# EAGLE board IoT (EAGLE 9.1.0)
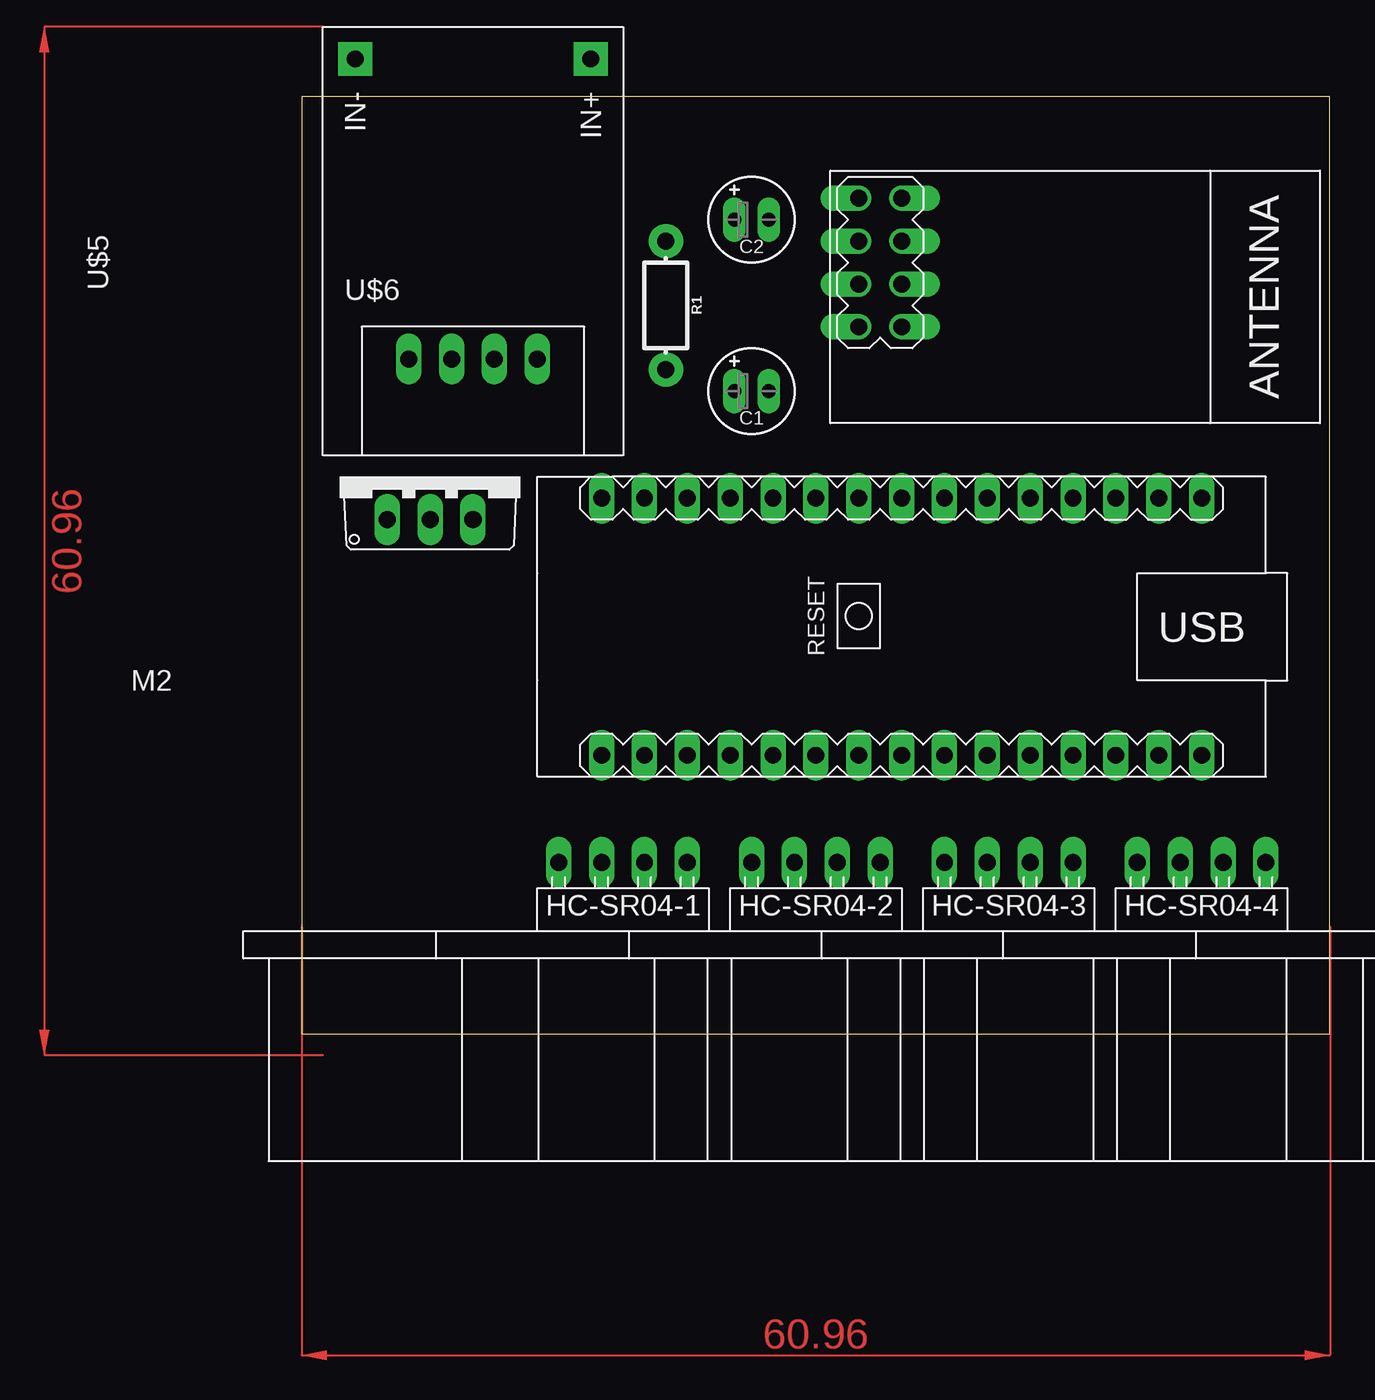
[diagram p0: board, top side]
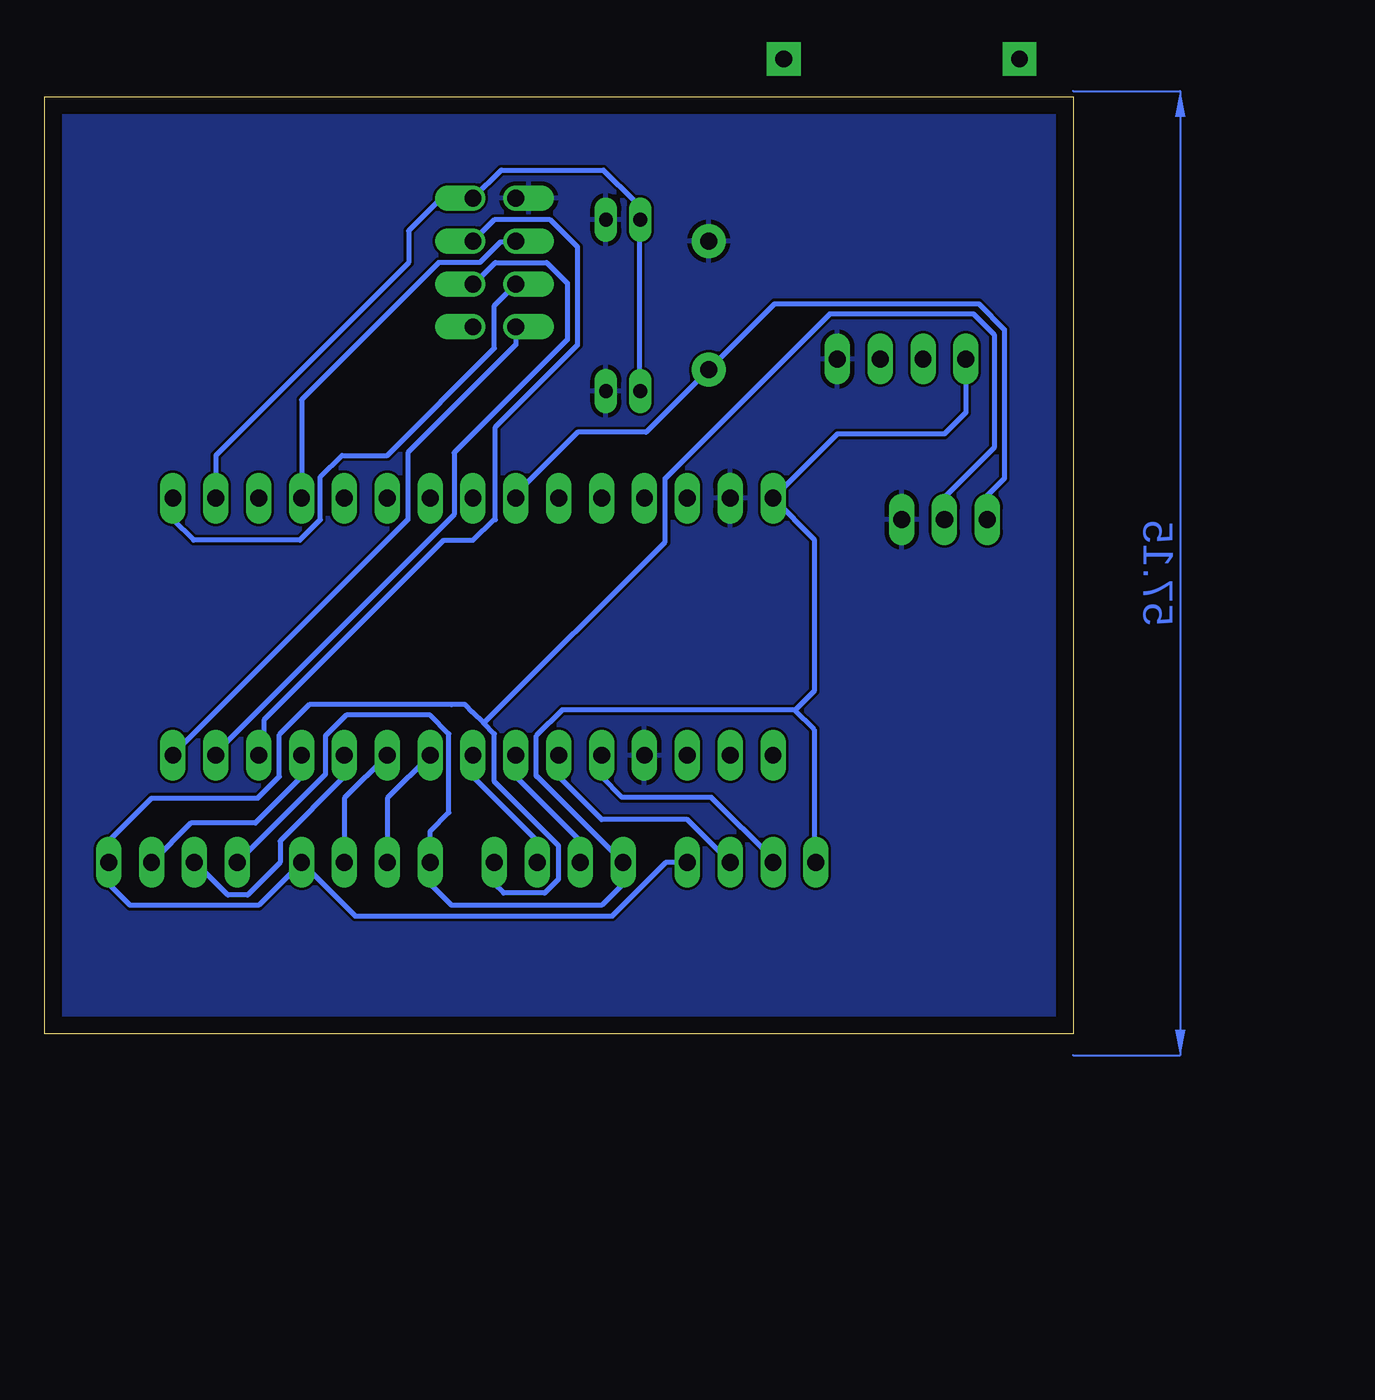
[diagram p1: board, bottom side, seen from below]

Size 60.94 x 55.55 mm. Coordinates in mm from the lower left corner, seen from the top.
Outline: 0,0 60.94,0 60.94,55.55 0,55.55 0,0
Copper layers (1*16): Top 0.035mm / dielectric 1.5mm / Bottom 0.035mm
Design rules "default": minimum track width 6mil, minimum drill 0.35mm, track to track 6mil, track to pad 6mil, pad to pad 6mil, via to via 6mil, smd to smd 6mil, copper to edge 40mil, drill to drill 6mil, minimum pad ring 10mil, minimum via ring 8mil, stop-mask expansion 4mil, vias tented up to drill 0mil, thermal gap 10mil
Net classes: 0 default: width 0.305 mm, drill 1 mm

## Footprints (pad centres in the part's own frame; a part is rotated, then mirrored left to right if it is on the bottom)
E2-5 = drill 0.813 long: + -1.016,0; - 1.016,0
ULTRASONIC-HC-SR04#V = drill 1 long: 1 -3.81,0; 2 -1.27,0; 3 1.27,0; 4 3.81,0
ARDUINO-NANO-3.0 = drill 1 pad 1.422 long: J1.1 17.78,7.62; J1.2 15.24,7.62; J1.3 12.7,7.62; J1.4 10.16,7.62; J1.5 7.62,7.62; J1.6 5.08,7.62; J1.7 2.54,7.62; J1.8 0,7.62; J1.9 -2.54,7.62; J1.10 -5.08,7.62; J1.11 -7.62,7.62; J1.12 -10.16,7.62; J1.13 -12.7,7.62; J1.14 -15.24,7.62; J1.15 -17.78,7.62; J2.1 17.78,-7.62; J2.2 15.24,-7.62; J2.3 12.7,-7.62; J2.4 10.16,-7.62; J2.5 7.62,-7.62; J2.6 5.08,-7.62; J2.7 2.54,-7.62; J2.8 0,-7.62; J2.9 -2.54,-7.62; J2.10 -5.08,-7.62; J2.11 -7.62,-7.62; J2.12 -10.16,-7.62; J2.13 -12.7,-7.62; J2.14 -15.24,-7.62; J2.15 -17.78,-7.62
WIRELESS-NRF24L01 = drill 1 offset: 1 -12.7,6.35; 2 -10.16,6.35; 3 -12.7,3.81; 4 -10.16,3.81; 5 -12.7,1.27; 6 -10.16,1.27; 7 -12.7,-1.27; 8 -10.16,-1.27
AXIAL-0.3-KIT = drill 1.016 pad 2.032: P$1 -3.81,0; P$2 3.81,0
DC-DC-STEP-UP-5V = drill 1 long: 5V 6.985,-3.81; D+ 6.985,1.27; D- 6.985,-1.27; GND 6.985,3.81 | drill 1 pad 2 square: IN+ -10.795,6.985; IN- -10.795,-6.985
TO220-VERT = drill 1.016 long: 1 -2.54,-2.54; 2 0,-2.54; 3 2.54,-2.54

## Placement (x,y rotation side)
C1  10U/35V  [E2-5]  26.67,38.1 0 top
C2  10U/35V  [E2-5]  26.67,48.26 0 top
HC-SR04-1  ULTRASONIC-HC-SR04#V  [ULTRASONIC-HC-SR04#V]  19.05,10.16 0 top
HC-SR04-2  ULTRASONIC-HC-SR04#V  [ULTRASONIC-HC-SR04#V]  30.48,10.16 0 top
HC-SR04-3  ULTRASONIC-HC-SR04#V  [ULTRASONIC-HC-SR04#V]  41.91,10.16 0 top
HC-SR04-4  ULTRASONIC-HC-SR04#V  [ULTRASONIC-HC-SR04#V]  53.34,10.16 0 top
M2  ARDUINO-NANO-3.0  [ARDUINO-NANO-3.0]  35.56,24.13 180 top
M3  WIRELESS-NRF24L01  [WIRELESS-NRF24L01]  45.72,43.18 0 top
R1  10k  [AXIAL-0.3-KIT]  21.59,43.18 270 top
U$5  DC-DC-STEP-UP-5V  [DC-DC-STEP-UP-5V]  10.16,46.99 270 top
U$6  IRL520N  [TO220-VERT]  7.62,33.02 0 top

## Library data of the parts
C1 C2 = capacitors-electrolytic; MOUSER: 647-USW1V100MDD
HC-SR04-1-HC-SR04-4 M2 M3 U$5 = diy-modules
R1 = SparkFun-Resistors; PROD_ID: RES-12183
U$6 = IRL520N; AVAILABILITY: Unavailable; DESCRIPTION: 100V Single N-Channel HEXFET Power MOSFET in a TO-220AB package; MF: International Rectifier; MP: IRL520N; PACKAGE: None; PRICE: 1.03 USD

## Nets
5V: M2.J2.4
GND: C1.- C2.- M2.J1.4 M2.J2.2 M3.1 R1.P$1 U$5.GND U$6.3
IN+: U$5.IN+
IN-: U$5.IN-
N$1: M2.J2.7 R1.P$2 U$6.1
N$2: C1.+ C2.+ M2.J2.14 M3.2
N$5: HC-SR04-1.2 M2.J1.5
N$6: HC-SR04-1.3 M2.J1.6
N$7: HC-SR04-2.3 M2.J1.8
N$8: HC-SR04-2.2 M2.J1.7
N$9: HC-SR04-1.4 HC-SR04-2.4 HC-SR04-3.4 HC-SR04-4.4 U$6.2
N$10: HC-SR04-3.3 M2.J1.10
N$11: HC-SR04-3.2 M2.J1.9
N$12: HC-SR04-4.3 M2.J1.12
N$13: HC-SR04-4.2 M2.J1.11
N$14: M2.J2.12 M3.3
N$15: M2.J1.13 M3.4
N$16: M2.J2.15 M3.5
N$17: M2.J1.14 M3.6
N$18: M2.J1.15 M3.7
VCC: HC-SR04-1.1 HC-SR04-2.1 HC-SR04-3.1 HC-SR04-4.1 M2.J2.1 U$5.5V

## Tracks (layer width: path | path; a pad name or v marks a point on that pad's centre or on a via)
GND
  pour Bottom: -2.54,57.15 -2.54,-3.81 62.23,-3.81 62.23,57.15
N$1
  Bottom 0.305: M2.J2.7 33.02,32 29.36,35.66 25.3,35.66 R1.P$2 17.68,43.28 5.59,43.28 4.06,41.76 4.06,32.92 5.08,31.9 U$6.1
N$2
  Bottom 0.305: C1.+ 25.7,38.1 25.7,48.16 C2.+ 25.7,48.46 26.01,48.77 26.01,49.38 27.84,51.21 33.88,51.21 M3.2 35.71,49.38 37.59,49.38 39.37,47.6 39.37,45.72 50.8,34.29 M2.J2.14
N$5
  Bottom 0.305: HC-SR04-1.2 17.78,10.36 21.44,14.02 26.72,14.02 27.94,15.24 M2.J1.5
N$6
  Bottom 0.305: M2.J1.6 30.48,15.24 27.94,12.7 22.86,12.7 HC-SR04-1.3
N$7
  Bottom 0.305: M2.J1.8 35.56,15.24 31.75,11.43 HC-SR04-2.3
N$8
  Bottom 0.305: M2.J1.7 33.02,15.24 29.21,11.43 HC-SR04-2.2
N$9
  Bottom 0.305: U$6.2 7.62,31.8 4.67,34.75 4.67,41.45 5.89,42.67 14.43,42.67 24.18,32.92 24.18,29.16 34.92,18.42 | HC-SR04-2.4 34.29,8.89 33.75,8.35 31.31,8.35 30.48,9.18 30.48,11.14 34.29,14.95 34.29,17.78 34.92,18.42 | HC-SR04-1.4 24.13,10.16 27.3,6.98 42.55,6.98 HC-SR04-3.4 48.26,7.62 55.88,7.62 57.15,8.89 HC-SR04-4.4 57.15,11.43 54.61,13.97 48.31,13.97 47.04,15.24 47.04,17.73 45.26,19.51 36.83,19.51 36.02,19.51 35.56,19.05 34.92,18.42
N$10
  Bottom 0.305: M2.J1.10 43.18,13.97 HC-SR04-3.3
N$11
  Bottom 0.305: M2.J1.9 40.64,13.97 HC-SR04-3.2
N$12
  Bottom 0.305: HC-SR04-4.3 52.27,12.5 48.46,12.5 45.72,15.24 M2.J1.12
N$13
  Bottom 0.305: HC-SR04-4.2 51.92,10.06 50.09,8.23 48.92,8.23 46.99,10.16 46.99,11.43 43.18,15.24 M2.J1.11
N$14
  Bottom 0.305: M3.3 33.02,46.94 33.93,46.94 35.15,45.72 37.59,45.72 45.72,37.59 M2.J2.12
N$15
  Bottom 0.305: M2.J1.13 48.26,16.76 47.95,17.07 47.95,18.59 37.29,29.26 35.56,29.26 34.34,30.48 34.24,30.48 34.24,35.97 29.36,40.84 29.36,46.63 30.99,48.26 34.29,48.26 M3.4
N$16
  Bottom 0.305: M3.5 34.29,43.18 34.29,40.64 40.64,34.29 43.33,34.29 44.6,33.02 44.6,30.48 45.82,29.26 52.12,29.26 53.34,30.48 M2.J2.15
N$17
  Bottom 0.305: M2.J1.14 50.7,16.76 36.68,30.78 36.68,34.44 29.97,41.15 29.97,44.5 31.19,45.72 34.24,45.72 35.51,44.45 M3.6
N$18
  Bottom 0.305: M2.J1.15 53.14,16.76 39.42,30.48 39.42,34.44 33.02,40.84 33.02,41.76 M3.7
VCC
  Bottom 0.305: HC-SR04-1.1 15.34,10.36 15.34,18.03 16.51,19.2 | 6.5,39.93 U$5.5V 6.35,36.83 7.62,35.56 13.97,35.56 M2.J2.1 15.34,29.31 15.34,20.32 16.46,19.2 16.51,19.2 | 16.51,19.2 30.28,19.2 31.8,17.68 31.8,15.24 31.75,15.24 HC-SR04-2.1 26.67,8.89 27.94,7.62 36.83,7.62 38.1,8.89 HC-SR04-3.1 38.1,11.99 36.98,13.11 36.98,17.78 38.1,18.9 43.08,18.9 44.3,17.68 44.3,15.39 HC-SR04-4.1
(copper drawn outside any net)
  shapes: Bottom area x1, Top area x2

## Text on the board
tDocu: Wits ParkSmart / 2018 | School of Electrical and Information Engineering